# Altium PCB PCB1.PcbDoc
Units mm, origin at the board's own origin, x right, y up, seen from the top; angles counter-clockwise.
Board outline 152.4 x 101.6 mm, 2 copper layers (Top Layer, Bottom Layer); 16 components, 10 nets, 45 pads, 0 vias.
Unrouted connection lines stored in the file: 20.
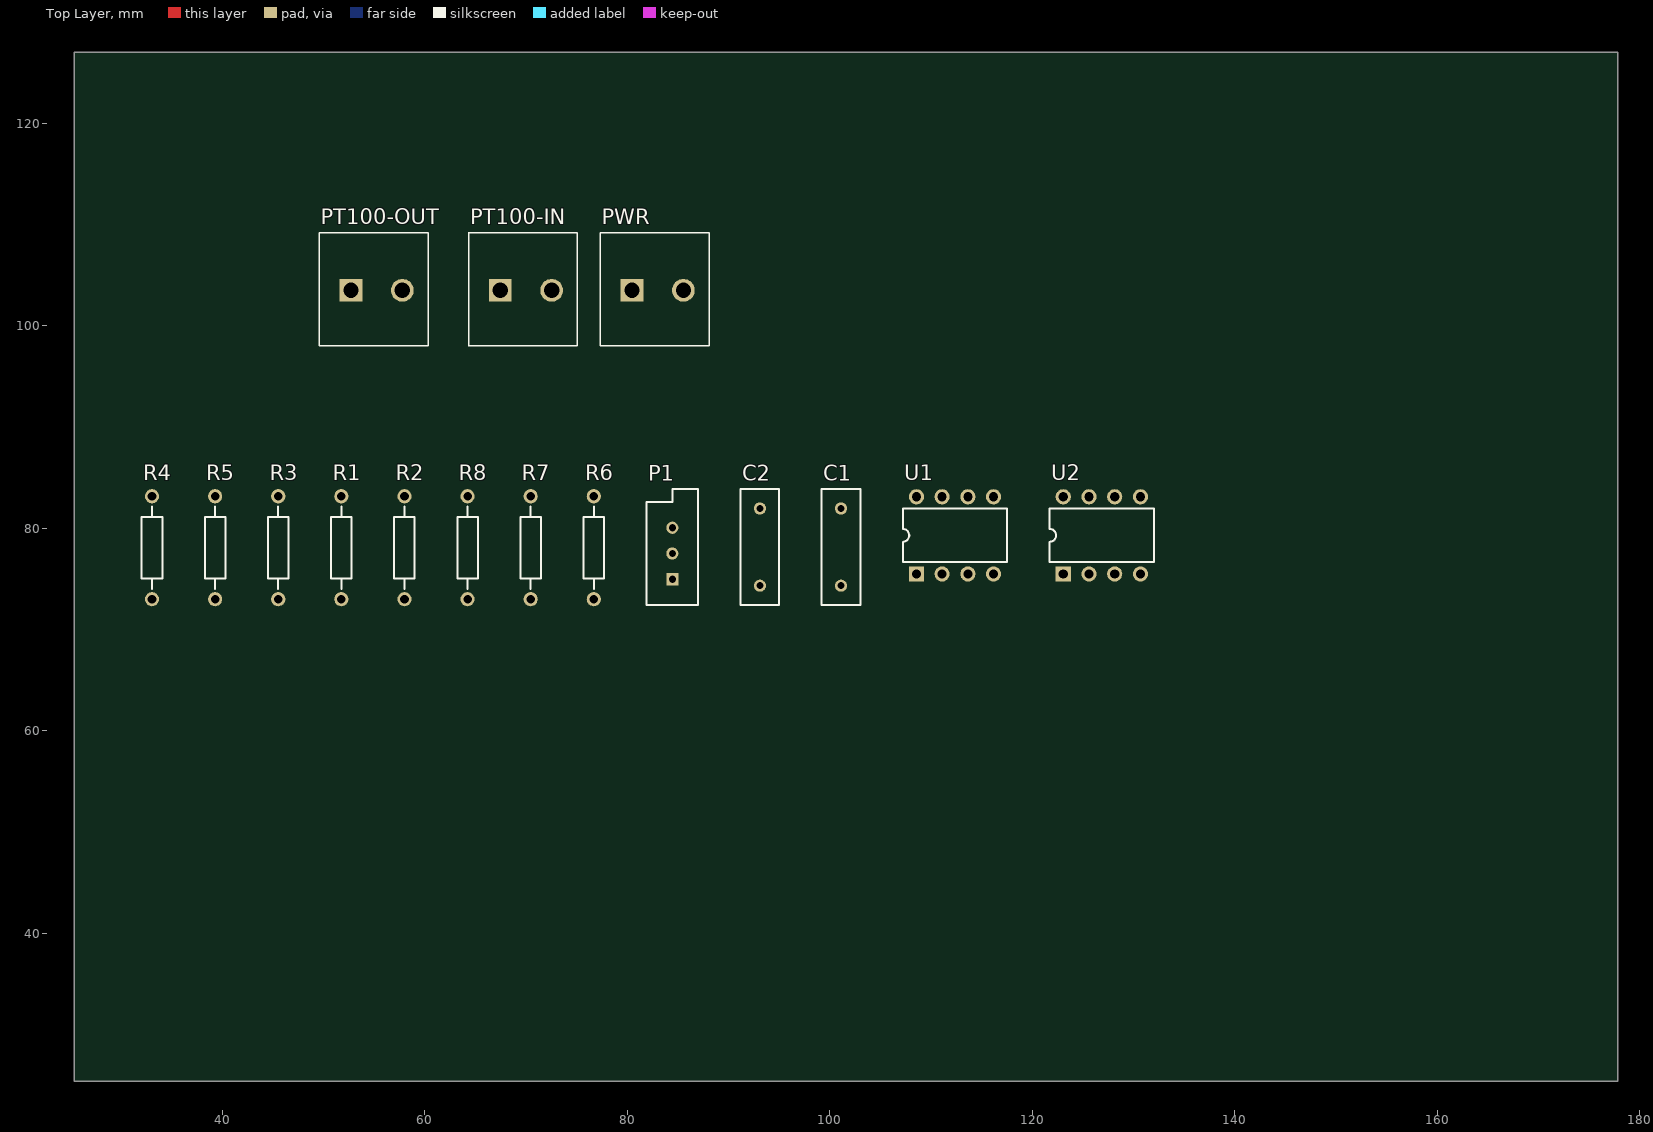
[diagram p0: Top Layer view]
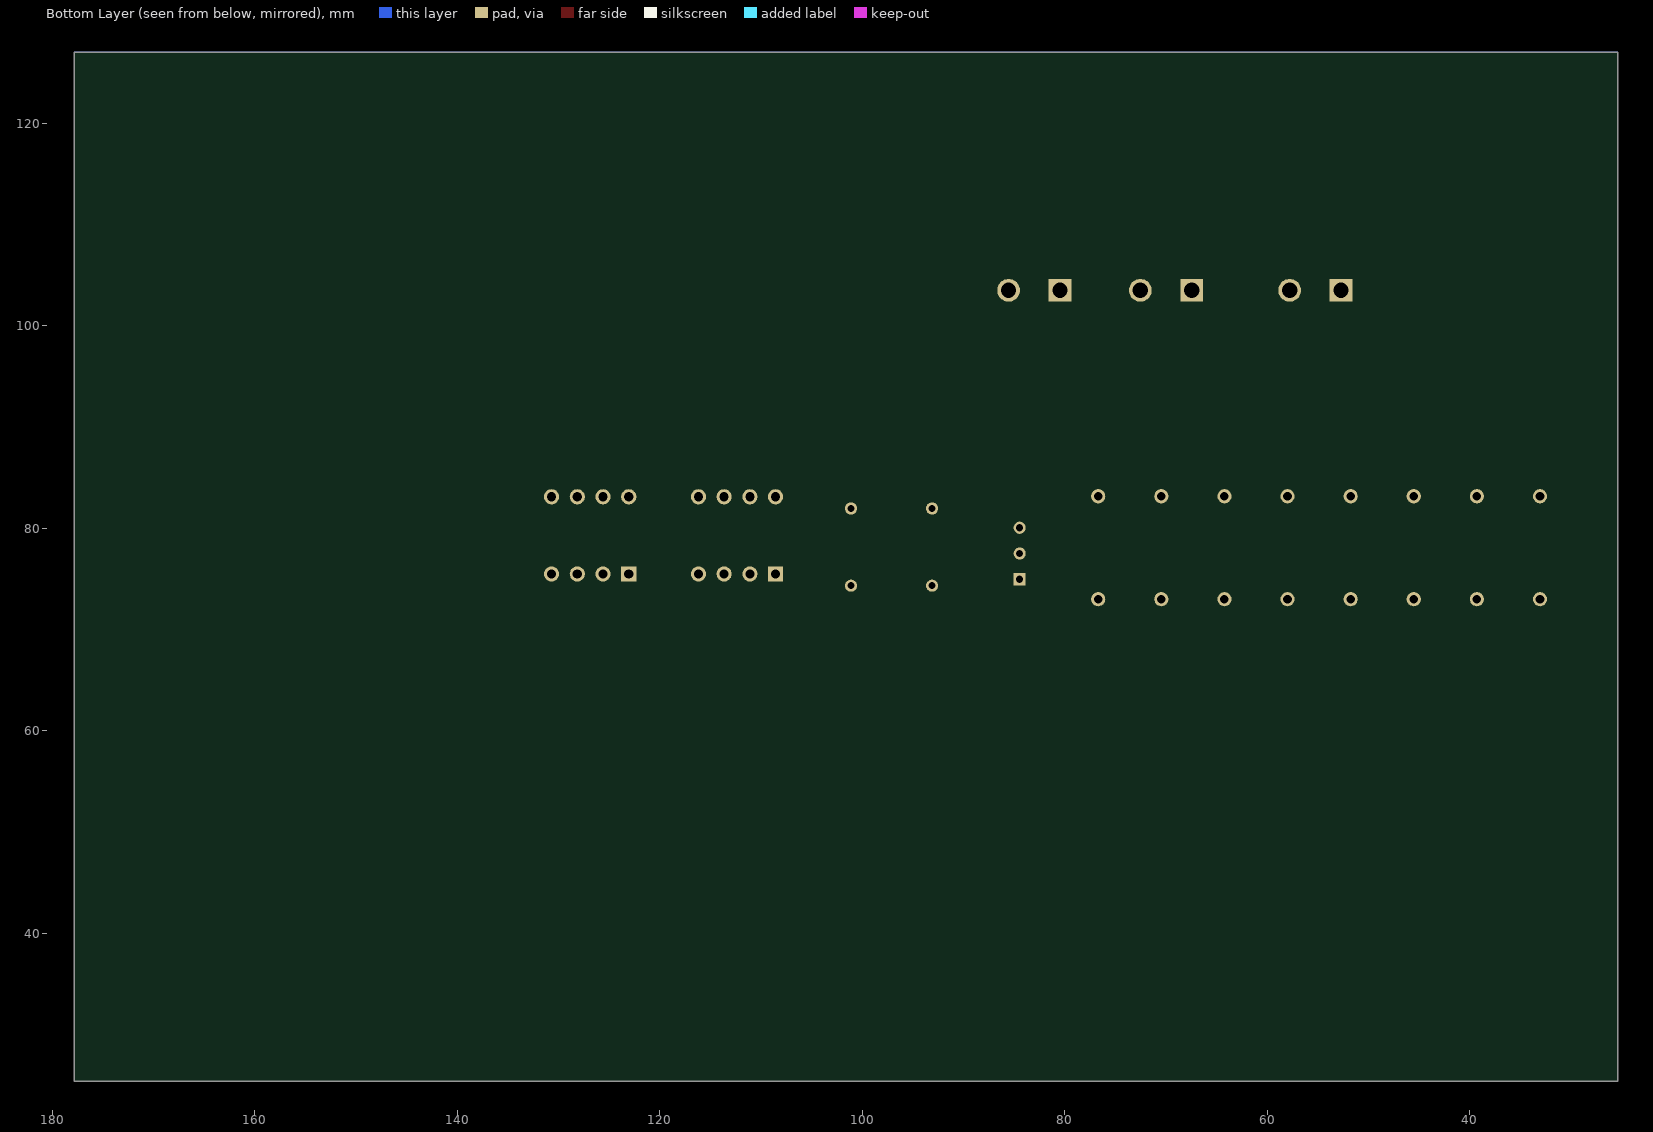
[diagram p1: Bottom Layer view, seen from below]

## Layer stack, top to bottom
Top Solder: solder mask 0.0102, Solder Resist, Dk 3.5
Top Layer: signal copper 0.0356
Dielectric 1: dielectric 0.32, FR-4, Dk 4.8
Bottom Layer: signal copper 0.0356
Bottom Solder: solder mask 0.0102, Solder Resist, Dk 3.5

## Board outline
25.4,25.4 177.8,25.4 177.8,127 25.4,127

## Design rules (kind name [scope] priority, off if disabled: settings)
Clearance [All] p1: gap=0.508
ComponentClearance [All] p1: gap=2 collisioncheckmode=3 verticalgap=0.254 showdistances=FALSE
PolygonConnect [All] p1: connectstyle=Relief reliefconductorwidth=0.254 reliefentries=4 polygonreliefangle="90 Angle" airgapwidth=0.254
RoomDefinition IO [InComponentClass('IO')] p1: confinementstyle=ConfineIn formatcopy=TRUE lockcomponents=FALSE outline 49.25,97.75 88.5,97.75 88.5,112 49.25,112
RoomDefinition "Condicionamento - Temperatura" [InComponentClass('Condicionamento - Temperatura')] p2: confinementstyle=ConfineIn formatcopy=TRUE lockcomponents=FALSE outline 29.956,39.526 141.436,39.526 141.436,86.216 29.956,86.216
RoutingLayers [All] p1: top layer_v5=FALSE bottom layer_v5=TRUE
RoutingVias [All] p1: holewidth=0.711 width=1.27 viastyle="Through Hole" minholewidth=0.711 minwidth=1.27 maxholewidth=0.711 maxwidth=1.27
SolderMaskExpansion [All] p1: expansion=0.102
Width [All] p1: maxlimit=0.762 minlimit=0.762 preferedwidth=0.762
28 further rules are at their usual default settings.

## Classes and differential pairs
component class IO: PT100-IN PT100-OUT PWR
component class "Condicionamento - Temperatura": C1 C2 P1 R1 R2 R3 R4 R5 R6 R7 R8 U1 U2

## Components (designator, comment, footprint, x,y, rotation, side; value= is the part's Value field where it differs from the comment)
C1 "Cap" RAD-0.3 101.107,78.147 r90 top
C2 "Cap" RAD-0.3 93.097,78.147 r90 top
P1 "RPot" VR5 84.452,77.512 r90 top
PT100-IN "691253510002" 691253510002 70,103.5 r0 top
PT100-OUT "691253510002" 691253510002 55.25,103.5 r0 top
PWR "691253510002" 691253510002 83,103.5 r0 top
R1 "Res2" AXIAL-0.4 51.768,78.08 r90 top
R2 "Res2" AXIAL-0.4 58,78.08 r270 top
R3 "Res2" AXIAL-0.4 45.536,78.08 r90 top
R4 "Res2" AXIAL-0.4 33.072,78.08 r90 top
R5 "Res2" AXIAL-0.4 39.304,78.08 r90 top
R6 "Res2" AXIAL-0.4 76.696,78.08 r90 top
R7 "Res2" AXIAL-0.4 70.464,78.08 r270 top
R8 "Res2" AXIAL-0.4 64.232,78.08 r90 top
U1 "OP27AZ" Q-8 112.362,79.3 r0 top
U2 "OP27AZ" Q-8 126.862,79.3 r0 top

## Footprints (in the part's own frame and the unit in brackets; to place one, negate y for a bottom-side part, rotate by r counter-clockwise, add the part's x,y. Pads: shape width x height; smd on the part's side, far side on the other; paste and mask are expansions set on the pad)
691253510002 [mm] "Serie 2535 - 5.08 mm _ 2 pins"
  rect 2.25x2.25 hole 1.5: 1(-2.54,0)
  round 2.25 hole 1.5: 2(2.54,0)
  silkscreen extent -5.68,-5.5 5.08,5.7, body extent -5.66,-5.5 5.1,5.7, height 18.1
AXIAL-0.4 [mm] "Axial Device, Thru-Hole; 2 Leads; 0.4 in Pin Spacing"
  round 1.4 hole 0.85: 1(-5.08,0) 2(5.08,0)
  silkscreen extent -4.06,-1.02 4.06,1.02
Q-8 [mm] "DIP; 8 Leads; Row Spacing 7.62 mm; Pitch 2.54 mm"
  rect 1.5x1.5 hole 0.9: 1(-3.81,-3.81)
  round 1.5 hole 0.9: 2(-1.27,-3.81) 3(1.27,-3.81) 4(3.81,-3.81) 5(3.81,3.81) 6(1.27,3.81) 7(-1.27,3.81) 8(-3.81,3.81)
  silkscreen extent -5.15,-2.65 5.15,2.65
RAD-0.3 [mm] "Radial Cap, Thru-Hole; 2 Leads; 0.3 in Pin Spacing"
  round 1.2 hole 0.7: 1(-3.81,0) 2(3.81,0)
  silkscreen extent -5.71,-1.91 5.72,1.9
VR5 [mm] "Thru-Hole; 3 Leads"
  rect 1.2x1.2 hole 0.7: 1(-2.54,0)
  round 1.2 hole 0.7: 2(0,0) 3(2.54,0)
  silkscreen extent -5.08,-2.54 6.35,2.54

## Part data
C1 C2: "Capacitor"
P1: "Potentiometer"
PT100-IN PT100-OUT PWR: "Horizontal Cable Entry with Rising Cage Clamp, Serie 2535 - 5.08mm"
R1 R2 R3 R4 R5 R6 R7 R8: "Resistor"
U1 U2: "Low-Noise, Precision Operational Amplifier"

## Nets (pads, with @x,y where several pads share a name; then routed paths per layer and width w, separated by ;. In a path a pad name is that pad's centre, name@x,y a point inside that pad or via, vN(x,y) a via of type N, cw(c..) or ccw(c..) an arc to the next point about the centre after c; other vN are vias at no path point)
+5: PWR.1 R1.2 R2.1 U1.7 U2.7
NetC1_2: C1.2 R5.2 U2.3
NetP1_1: P1.1 R4.2
NetP1_3: P1.3 R2.2 R3.2 U1.2
NetR4_1: R4.1 R5.1 U1.6
NetR6_2: R6.2 R7.1 U2.2
NetR7_2: R7.2 R8.1 U2.6
PT100-1: PT100-IN.1 R1.1 U1.3
PT100-2: C1.1 C2.1 PT100-IN.2 PT100-OUT.2 PWR.2 R3.1 R6.1 U1.4 U2.4
PT100-OUT-1: C2.2 PT100-OUT.1 R8.2
pads on no net: P1.2 U1.1 U1.5 U1.8 U2.1 U2.5 U2.8

## Polygon pours and split planes (outlines as drawn)
PT100-2 on Bottom Layer "Ground Plane" (solid, remove dead copper, shelved, pour order 2): 25.4,127 177.8,127 177.8,25.4 25.4,25.4